# Altium PCB Placa_TP1.PcbDoc
Units mm, origin at the board's own origin, x right, y up, seen from the top; angles counter-clockwise.
Board outline 134.62 x 176.53 mm, 2 copper layers (Top Layer, Bottom Layer); 168 components, 105 nets, 468 pads, 64 vias.
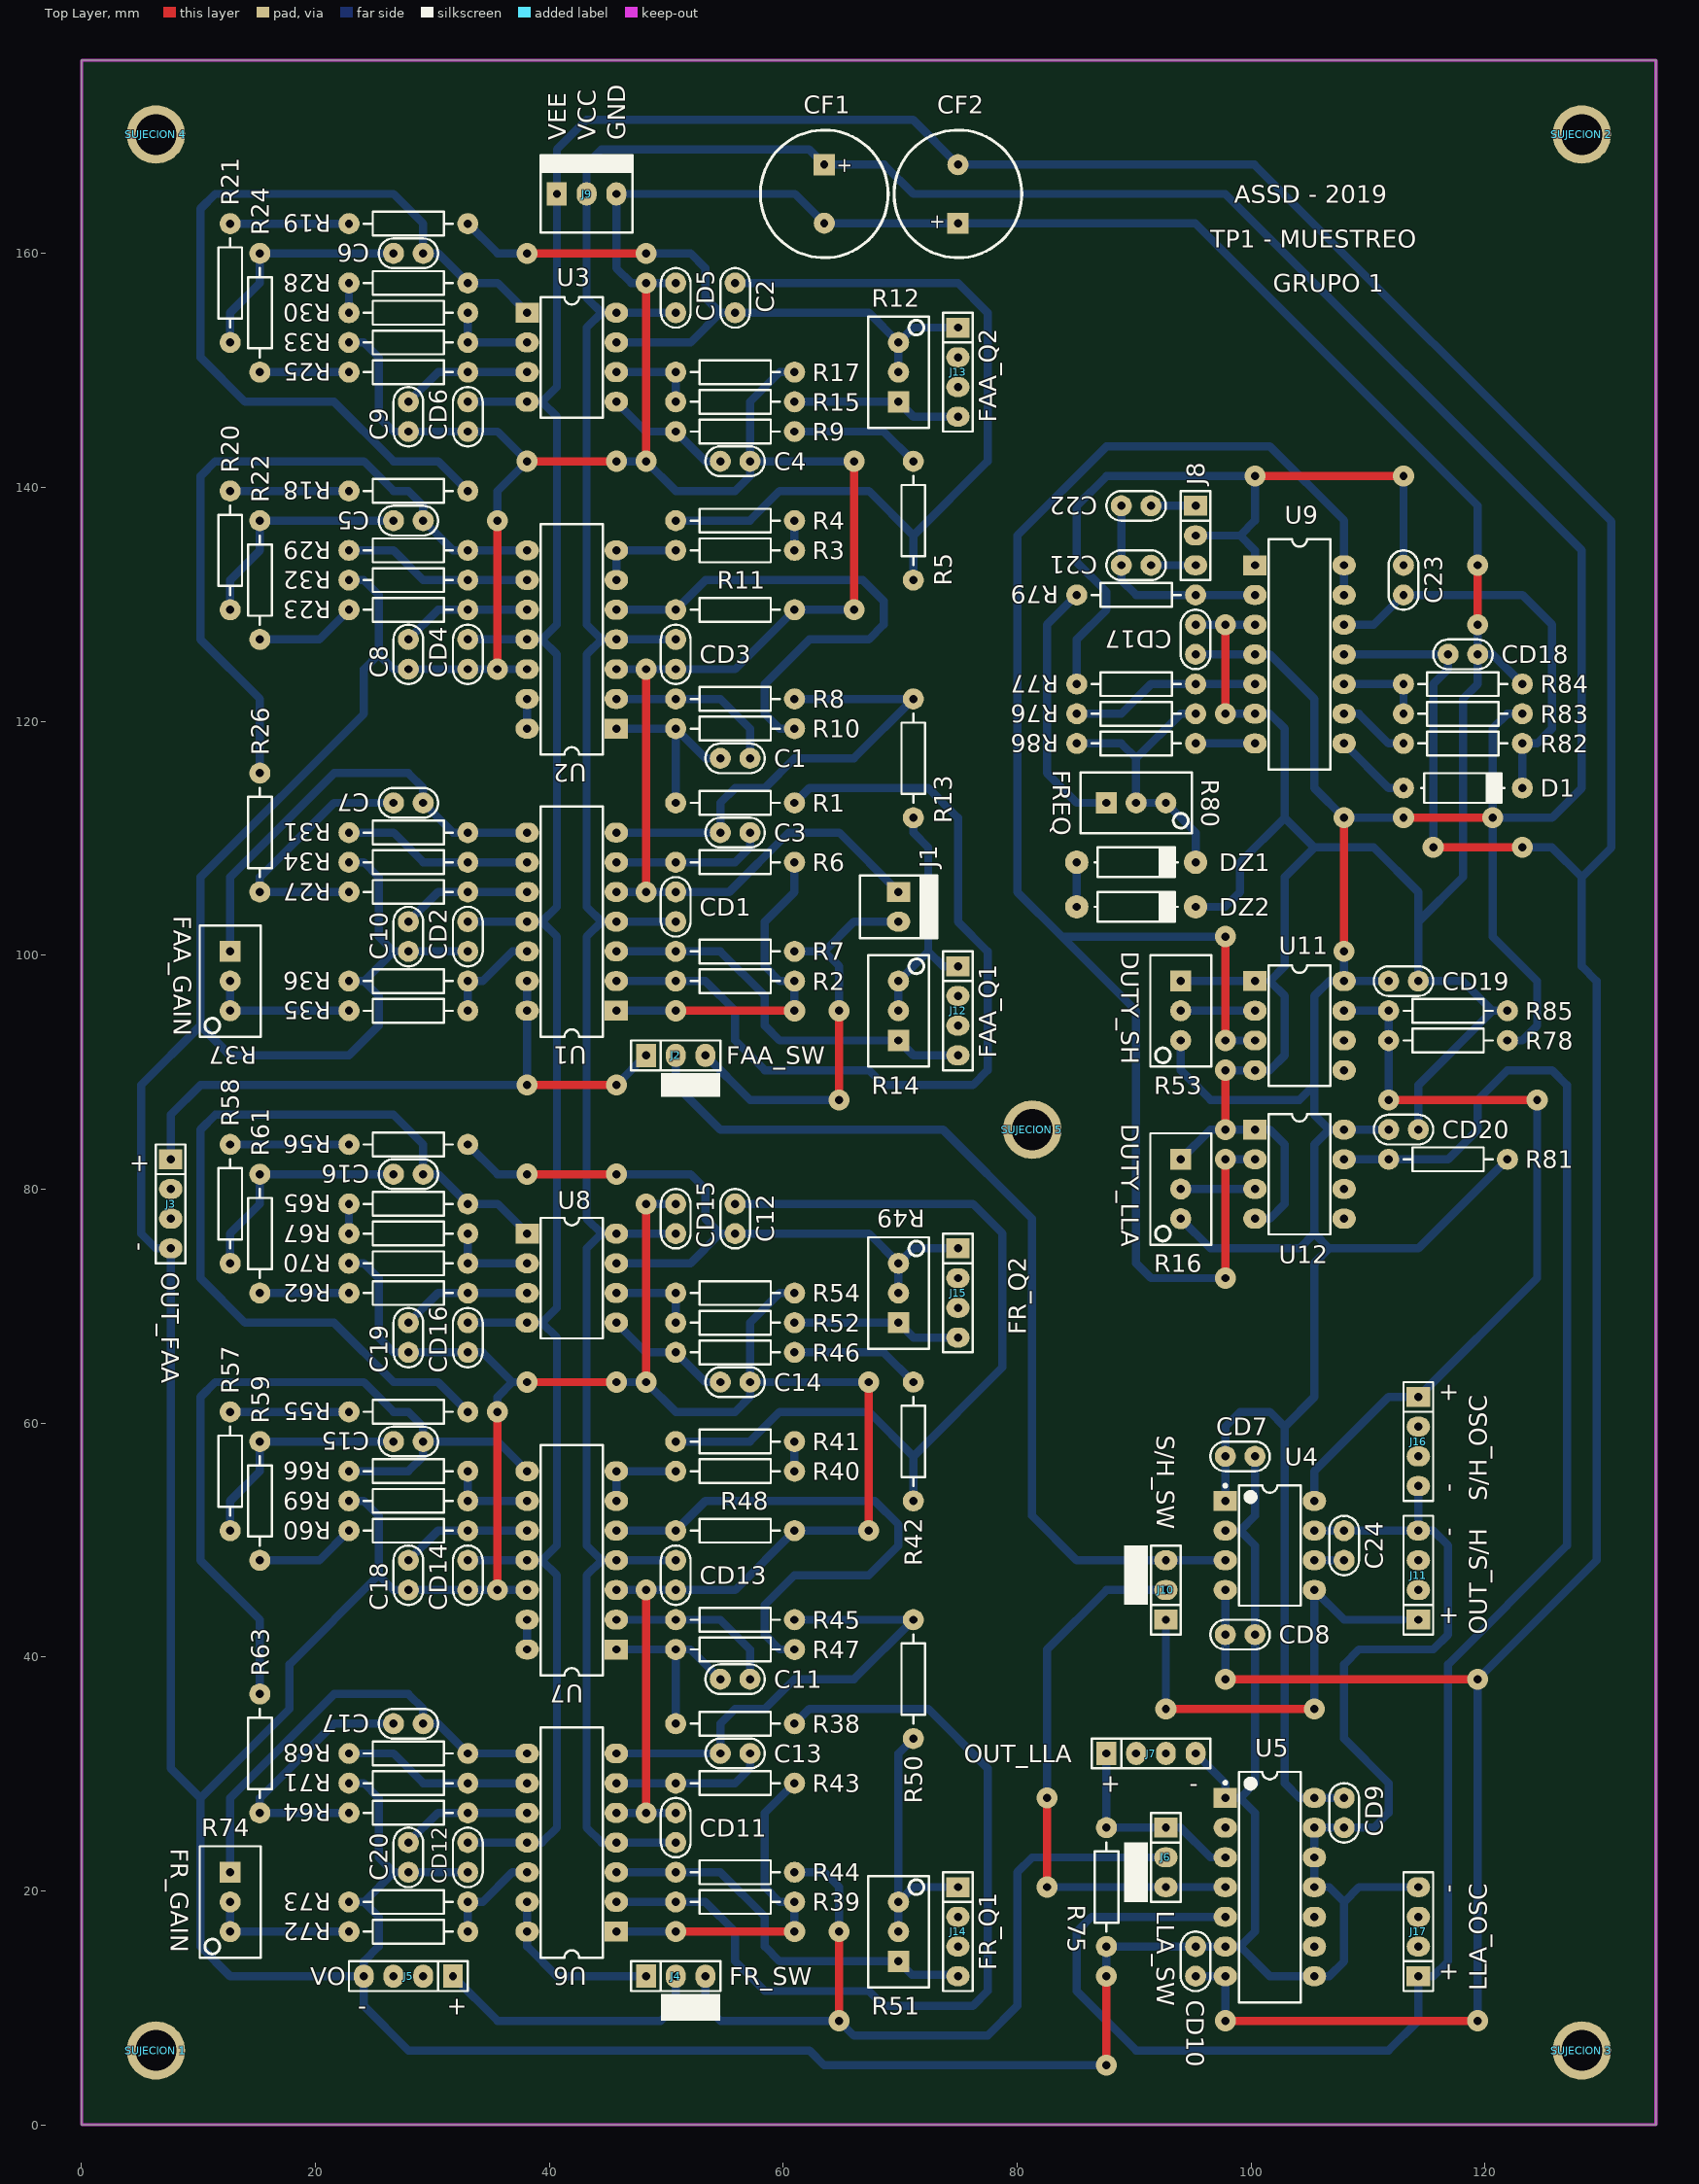
[diagram p0: Top Layer view]
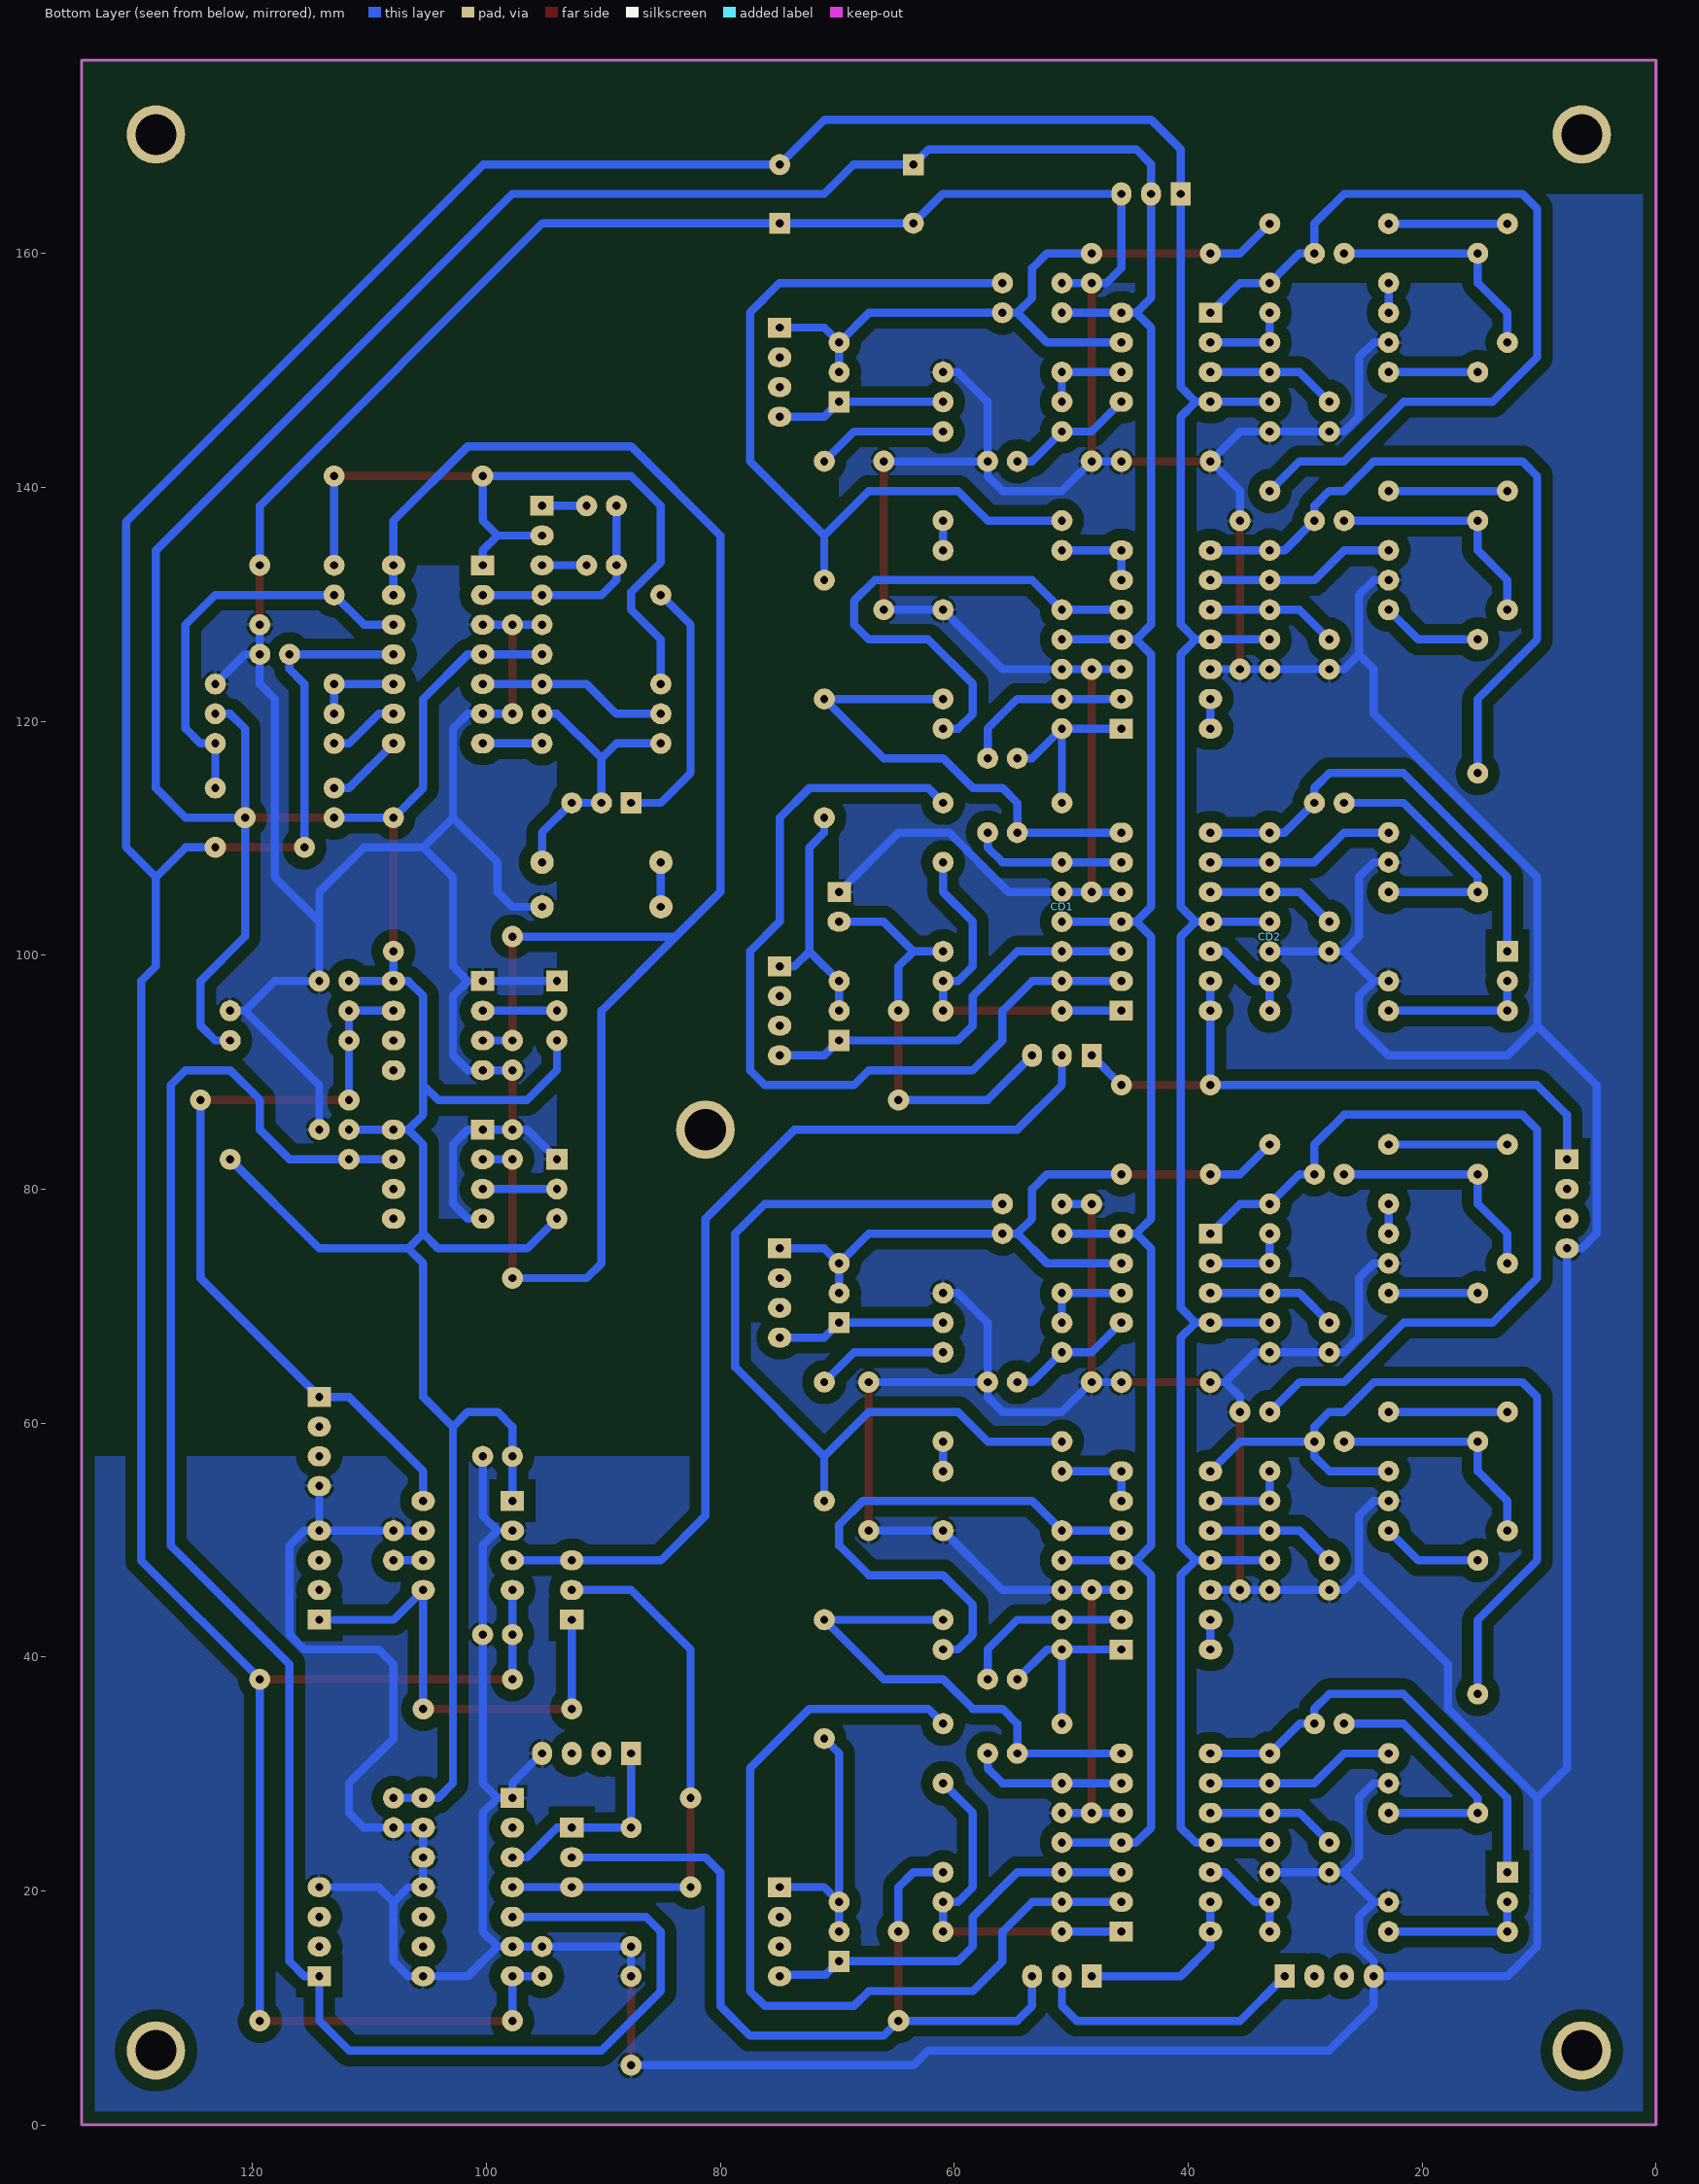
[diagram p1: Bottom Layer view, seen from below]
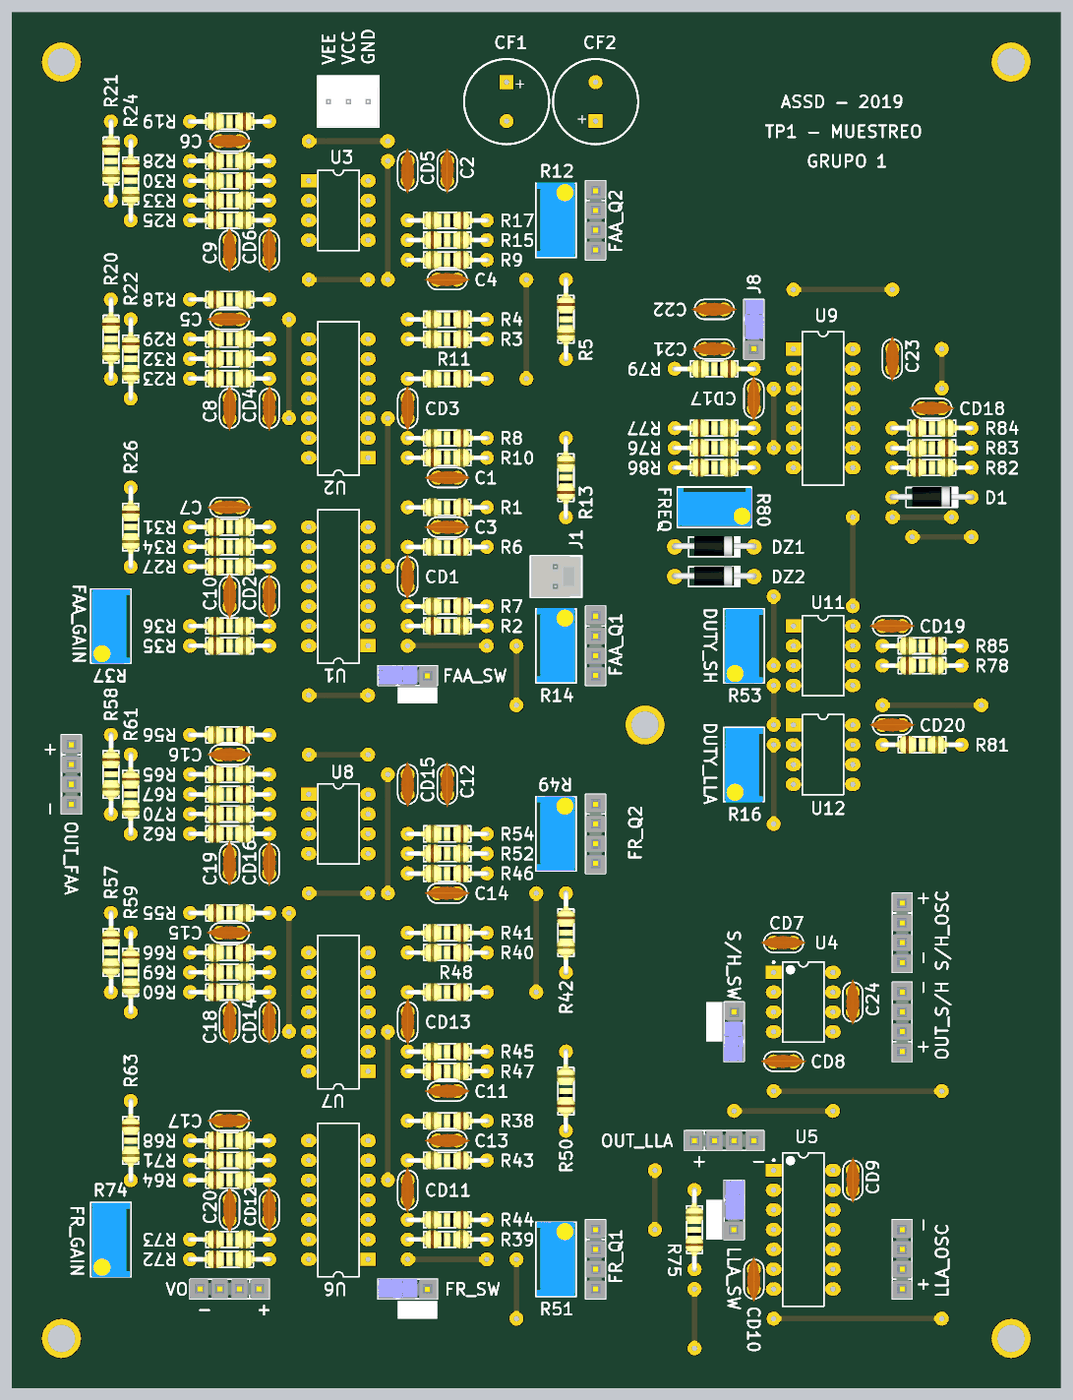
[diagram p2: 3D render of the assembled board from above, using the file's embedded part models]

## Layer stack, top to bottom
Top Solder: solder mask 0.0102, Solder Resist, Dk 3.5
Top Layer: signal copper 0.0356
Dielectric 1: dielectric 0.32, FR-4, Dk 4.8
Bottom Layer: signal copper 0.0356
Bottom Solder: solder mask 0.0102, Solder Resist, Dk 3.5

## Board outline
0,0 0,176.53 134.62,176.53 134.62,0

## Design rules (kind name [scope] priority, off if disabled: settings)
Clearance [All] p1: gap=0.7
ComponentClearance [All] p1: gap=0.2 collisioncheckmode=3 verticalgap=0.254 showdistances=FALSE
PolygonConnect [All] p1: connectstyle=Relief reliefconductorwidth=0.254 reliefentries=4 polygonreliefangle="90 Angle" airgapwidth=0.254
RoutingVias [All] p1: holewidth=0.7 width=1.8 viastyle="Through Hole" minholewidth=0.7 minwidth=1.8 maxholewidth=0.7 maxwidth=1.8
SolderMaskExpansion [All] p1: expansion=0.102
Width [All] p1: maxlimit=0.7 minlimit=0.7 preferedwidth=0.7
29 further rules are at their usual default settings.

## Classes and differential pairs
component class SampleANDHold: C24 CD7 CD8 CF1 CF2 J9 J10 J11 ROT2 "SUJECION 1" "SUJECION 2" "SUJECION 3" "SUJECION 4" "SUJECION 5" U4
component class Oscilador: C21 C22 C23 CD17 CD18 CD19 CD20 D1 DZ1 DZ2 J8 J16 J17 R16 R53 R76 R77 R78 R79 R80 R81 R82 R83 R84 R85 R86 ROT5 U9 U11 U12
component class LLaveAnalogica: CD9 CD10 J6 J7 R75 ROT3 U5
component class FiltroRecuperador: C11 C12 C13 C14 C15 C16 C17 C18 C19 C20 CD11 CD12 CD13 CD14 CD15 CD16 J4 J5 J14 J15 R38 R39 R40 R41 R42 R43 R44 R45 R46 R47 R48 R49 R50 R51 R52 R54 R55 R56 R57 R58 R59 R60 R61 R62 R63 R64 R65 R66 R67 R68 R69 R70 R71 R72 R73 R74 ROT4 U6 U7 U8
component class FiltroAntialiasing: C1 C2 C3 C4 C5 C6 C7 C8 C9 C10 CD1 CD2 CD3 CD4 CD5 CD6 J1 J2 J3 J12 J13 R1 R2 R3 R4 R5 R6 R7 R8 R9 R10 R11 R12 R13 R14 R15 R17 R18 R19 R20 R21 R22 R23 R24 R25 R26 R27 R28 R29 R30 R31 R32 R33 R34 R35 R36 R37 ROT1 U1 U2 U3

## Components (designator, comment, footprint, x,y, rotation, side; value= is the part's Value field where it differs from the comment)
C1 "100n" CAP100#1 55.88,116.84 r180 top
C2 "100n" CAP100#1 55.88,156.21 r270 top
C3 "100n" CAP100#1 55.88,110.49 r180 top
C4 "100n" CAP100#1 55.88,142.24 r0 top
C5 "100n" CAP100#1 27.94,137.16 r0 top
C6 "100n" CAP100#1 27.94,160.02 r0 top
C7 "100n" CAP100#1 27.94,113.03 r0 top
C8 "100n" CAP100#1 27.94,125.73 r270 top
C9 "100n" CAP100#1 27.94,146.05 r90 top
C10 "100n" CAP100#1 27.94,101.6 r270 top
C11 "100n" CAP100#1 55.88,38.1 r180 top
C12 "100n" CAP100#1 55.88,77.47 r270 top
C13 "100n" CAP100#1 55.88,31.75 r180 top
C14 "100n" CAP100#1 55.88,63.5 r0 top
C15 "100n" CAP100#1 27.94,58.42 r0 top
C16 "100n" CAP100#1 27.94,81.28 r0 top
C17 "100n" CAP100#1 27.94,34.29 r0 top
C18 "100n" CAP100#1 27.94,46.99 r270 top
C19 "100n" CAP100#1 27.94,67.31 r90 top
C20 "100n" CAP100#1 27.94,22.86 r270 top
C21 "10n" CAP100#1 90.17,133.35 r0 top
C22 "1n" CAP100#1 90.17,138.43 r0 top
C23 "100n" CAP100#1 113.03,132.08 r270 top
C24 "10n" CAP100#1 107.95,49.53 r90 top
CD1 "100n" CAP100#2 50.8,104.14 r270 bottom
CD2 "100n" CAP100#2 33.02,101.6 r90 bottom
CD3 "100n" CAP100#1 50.8,125.73 r270 top
CD4 "100n" CAP100#1 33.02,125.73 r270 top
CD5 "100n" CAP100#1 50.8,156.21 r90 top
CD6 "100n" CAP100#1 33.02,146.05 r270 top
CD7 "100n" CAP100#1 99.06,57.15 r0 top
CD8 "100n" CAP100#1 99.06,41.91 r0 top
CD9 "100n" CAP100#1 107.95,26.67 r270 top
CD10 "100n" CAP100#1 95.25,13.97 r90 top
CD11 "100n" CAP100#1 50.8,25.4 r90 top
CD12 "100n" CAP100#1 33.02,22.86 r270 top
CD13 "100n" CAP100#1 50.8,46.99 r270 top
CD14 "100n" CAP100#1 33.02,46.99 r270 top
CD15 "100n" CAP100#1 50.8,77.47 r90 top
CD16 "100n" CAP100#1 33.02,67.31 r270 top
CD17 "100n" CAP100#1 95.25,127 r90 top
CD18 "100n" CAP100#1 118.11,125.73 r0 top
CD19 "100n" CAP100#1 113.03,97.79 r0 top
CD20 "100n" CAP100#1 113.03,85.09 r0 top
CF1 "330u" CAP200RP 63.5,165.1 r270 top
CF2 "330u" CAP200RP 74.93,165.1 r90 top
D1 "1N4148" DO41#1 118.11,114.3 r0 top
DZ1 "1N4733" DO41#2 90.17,107.95 r0 top
DZ2 "1N4733" DO41#2 90.17,104.14 r0 top
J1 "V_INPUT" MOLEX2 69.85,105.41 r270 top
J2 "FAA_SW" JUMPER3 50.8,91.44 r0 top
J3 "OUT_FAA" SIP4 7.62,78.74 r270 top
J4 "FR_SW" JUMPER3 50.8,12.7 r0 top
J5 "OUT_FR" SIP4 27.94,12.7 r180 top
J6 "LLA_SW" JUMPER3 92.71,22.86 r270 top
J7 "OUT_LLA" SIP4 91.44,31.75 r0 top
J8 "JUMPER" JUMPER3 95.25,135.89 r270 top
J9 "FUENTE" MOLEX3 40.64,165.1 r0 top
J10 "S/H_SW" JUMPER3 92.71,45.72 r90 top
J11 "OUT_S/H" SIP4 114.3,46.99 r90 top
J12 "TP_R14" SIP4 74.93,95.25 r270 top
J13 "TP_R12" SIP4 74.93,149.86 r270 top
J14 "TP_R51" SIP4 74.93,16.51 r270 top
J15 "TP_R49" SIP4 74.93,71.12 r270 top
J16 "S/H_OSC" SIP4 114.3,58.42 r270 top
J17 "LLA_OSC" SIP4 114.3,16.51 r90 top
R1 "10K" RES400 60.96,113.03 r180 top
R2 "10K" RES400 50.8,97.79 r0 top
R3 "1K" RES400 60.96,134.62 r180 top
R4 "82" RES400 60.96,137.16 r180 top
R5 "1K" RES400 71.12,142.24 r270 top
R6 "1K" RES400 60.96,107.95 r180 top
R7 "3K3" RES400 60.96,100.33 r180 top
R8 "1K" RES400 60.96,121.92 r180 top
R9 "82" RES400 60.96,144.78 r180 top
R10 "10K" RES400 50.8,119.38 r0 top
R11 "1K" RES400 60.96,129.54 r180 top
R12 "200" "PRESET V" 69.85,149.86 r90 top
R13 "47K" RES400 71.12,111.76 r90 top
R14 "20K" "PRESET V" 69.85,95.25 r90 top
R15 "1K8" RES400 50.8,147.32 r0 top
R16 "10K" "PRESET V" 93.98,80.01 r270 top
R17 "1K2" RES400 60.96,149.86 r180 top
R18 "1K5" RES400 22.86,139.7 r0 top
R19 "1K2" RES400 33.02,162.56 r180 top
R20 "270" RES400 12.7,139.7 r270 top
R21 "100" RES400 12.7,162.56 r270 top
R22 "1K5" RES400 15.24,137.16 r270 top
R23 "270" RES400 22.86,129.54 r0 top
R24 "1K2" RES400 15.24,160.02 r270 top
R25 "100" RES400 22.86,149.86 r0 top
R26 "2K4" RES400 15.24,115.57 r270 top
R27 "2K4" RES400 22.86,105.41 r0 top
R28 "560" RES400 22.86,157.48 r0 top
R29 "1K2" RES400 22.86,134.62 r0 top
R30 "1K" RES400 33.02,154.94 r180 top
R31 "2K2" RES400 22.86,110.49 r0 top
R32 "1K5" RES400 22.86,132.08 r0 top
R33 "1K2" RES400 22.86,152.4 r0 top
R34 "15K" RES400 22.86,107.95 r0 top
R35 "10K" RES400 22.86,95.25 r0 top
R36 "10K" RES400 22.86,97.79 r0 top
R37 "10K" "PRESET V" 12.7,97.79 r270 top
R38 "10K" RES400 60.96,34.29 r180 top
R39 "10K" RES400 50.8,19.05 r0 top
R40 "1K" RES400 60.96,55.88 r180 top
R41 "82" RES400 60.96,58.42 r180 top
R42 "1K" RES400 71.12,63.5 r270 top
R43 "1K" RES400 60.96,29.21 r180 top
R44 "3K3" RES400 60.96,21.59 r180 top
R45 "1K" RES400 60.96,43.18 r180 top
R46 "82" RES400 60.96,66.04 r180 top
R47 "10K" RES400 50.8,40.64 r0 top
R48 "1K" RES400 60.96,50.8 r180 top
R49 "200" "PRESET V" 69.85,71.12 r90 top
R50 "47K" RES400 71.12,33.02 r90 top
R51 "20K" "PRESET V" 69.85,16.51 r90 top
R52 "1K8" RES400 50.8,68.58 r0 top
R53 "10K" "PRESET V" 93.98,95.25 r270 top
R54 "1K2" RES400 60.96,71.12 r180 top
R55 "1K5" RES400 22.86,60.96 r0 top
R56 "1K2" RES400 33.02,83.82 r180 top
R57 "270" RES400 12.7,60.96 r270 top
R58 "100" RES400 12.7,83.82 r270 top
R59 "1K5" RES400 15.24,58.42 r270 top
R60 "270" RES400 22.86,50.8 r0 top
R61 "1K2" RES400 15.24,81.28 r270 top
R62 "100" RES400 22.86,71.12 r0 top
R63 "2K4" RES400 15.24,36.83 r270 top
R64 "2K4" RES400 22.86,26.67 r0 top
R65 "560" RES400 22.86,78.74 r0 top
R66 "1K2" RES400 33.02,55.88 r180 top
R67 "1K" RES400 33.02,76.2 r180 top
R68 "2K2" RES400 22.86,31.75 r0 top
R69 "1K5" RES400 22.86,53.34 r0 top
R70 "1K2" RES400 22.86,73.66 r0 top
R71 "15K" RES400 22.86,29.21 r0 top
R72 "10K" RES400 22.86,16.51 r0 top
R73 "10K" RES400 22.86,19.05 r0 top
R74 "10K" "PRESET V" 12.7,19.05 r270 top
R75 "10K" RES400 87.63,15.24 r90 top
R76 "RES" RES400 85.09,120.65 r0 top
R77 "1K" RES400 85.09,123.19 r0 top
R78 "1K" RES400 111.76,92.71 r0 top
R79 "RES" RES400 95.25,130.81 r180 top
R80 "PRESET" "PRESET V" 90.17,113.03 r0 top
R81 "1K" RES400 111.76,82.55 r0 top
R82 "1K" RES400 113.03,118.11 r0 top
R83 "6K8" RES400 123.19,120.65 r180 top
R84 "1K" RES400 113.03,123.19 r0 top
R85 "680" RES400 121.92,95.25 r180 top
R86 "RES" RES400 85.09,118.11 r0 top
"SUJECION 1" "SUJECION" "SUJECION (5.00MM - 3.50MM)" 6.35,6.35 r90 top
"SUJECION 2" "SUJECION" "SUJECION (5.00MM - 3.50MM)" 128.27,170.18 r90 top
"SUJECION 3" "SUJECION" "SUJECION (5.00MM - 3.50MM)" 128.27,6.35 r90 top
"SUJECION 4" "SUJECION" "SUJECION (5.00MM - 3.50MM)" 6.35,170.18 r90 top
"SUJECION 5" "SUJECION" "SUJECION (5.00MM - 3.50MM)" 81.28,85.09 r90 top
U1 "TL084N" N014 41.91,102.87 r90 top
U2 "TL084N" N014 41.91,127 r90 top
U3 "TL082JG" JG008 41.91,151.13 r270 top
U4 "LF398N" N08E 101.6,49.53 r0 top
U5 "CD4066BCN" N14A 101.6,20.32 r0 top
U6 "TL084N" N014 41.91,24.13 r90 top
U7 "TL084N" N014 41.91,48.26 r90 top
U8 "TL082JG" JG008 41.91,72.39 r270 top
U9 "TL084N" N014 104.14,125.73 r270 top
U11 "LM311N" 626-05 104.14,93.98 r270 top
U12 "LM311N" 626-05 104.14,81.28 r270 top

## Footprints (in the part's own frame and the unit in brackets; to place one, negate y for a bottom-side part, rotate by r counter-clockwise, add the part's x,y. Pads: shape width x height; smd on the part's side, far side on the other; paste and mask are expansions set on the pad)
626-05 [mm] "DIP; 8 Leads; Row Spacing 7.62 mm; Pitch 2.54 mm"
  rect 1.7x2 hole 0.7: 1(-3.81,-3.81)
  oval 1.7x2 hole 0.7: 2(-1.27,-3.81) 3(1.27,-3.81) 4(3.81,-3.81) 5(3.81,3.81) 6(1.27,3.81) 7(-1.27,3.81) 8(-3.81,3.81)
  silkscreen extent -5.15,-2.65 5.15,2.65
CAP100#1 [mm]
  round 1.8 hole 0.7: 1(-1.27,0) 2(1.27,0)
  silkscreen extent -2.54,-1.27 2.54,1.27, body extent -2.92,-0.84 2.92,0.86, height 6.12
CAP100#2 [mm]
  round 1.8 hole 0.7: 1(1.27,0) 2(-1.27,0)
  body extent -2.92,-0.84 2.92,0.86, height 6.12
CAP200RP [mm] "Body Diameter 10.33mm"
  rect 1.8x1.8 hole 0.7: 1(-2.5,0)
  round 1.8 hole 0.7: 2(2.5,0)
  silkscreen extent -5.46,-5.46 5.46,5.46, body extent -5.2,-5.18 5.18,5.21, height 20
DO41#1 [mm]
  round 1.8 hole 0.7: 1(-5.08,0) 2(5.08,0)
  silkscreen extent -3.56,-1.27 3.56,1.27, body extent -5.46,-1.19 5.46,1.37, height 2.03
DO41#2 [mm]
  round 2 hole 0.7: 1(-5.08,0) 2(5.08,0)
  silkscreen extent -3.56,-1.27 3.56,1.27, body extent -5.46,-1.19 5.46,1.37, height 2.03
JG008 [mm] "DIP; 8 Leads; Row Spacing 7.62 mm; Pitch 2.54 mm"
  rect 1.7x2 hole 0.7: 1(-3.81,-3.81)
  oval 1.7x2 hole 0.7: 2(-1.27,-3.81) 3(1.27,-3.81) 4(3.81,-3.81) 5(3.81,3.81) 6(1.27,3.81) 7(-1.27,3.81) 8(-3.81,3.81)
  silkscreen extent -5.15,-2.65 5.15,2.65
JUMPER3 [mm]
  rect 1.7x2 hole 0.7: 1(-2.54,0)
  oval 1.7x2 hole 0.7: 2(0,0) 3(2.54,0)
  silkscreen extent -3.81,-1.27 3.81,1.27, body extent -3.81,-1.3 3.81,1.27, height 16.15
MOLEX2 [mm]
  rect 1.7x2 hole 0.7: 1(0,0)
  oval 1.7x2 hole 0.7: 2(2.54,0)
  silkscreen extent -1.4,-3.3 3.94,3.3, body extent -1.27,-3.18 3.81,3.18, height 10.74
MOLEX3 [mm]
  rect 1.7x2 hole 0.7: 1(0,0)
  oval 1.7x2 hole 0.7: 2(2.54,0) 3(5.08,0)
  silkscreen extent -1.4,-3.3 6.48,3.3, body extent -1.27,-3.17 6.35,3.17, height 10.74
N08E [mm] "DIP, 8-Leads, Row Spacing 7.62mm, Pitch 2.54mm, Body 9.91x6.35mm"
  rect 2x1.7 hole 0.7: 1(-3.81,3.81)
  oval 2x1.7 hole 0.7: 2(-3.81,1.27) 3(-3.81,-1.27) 4(-3.81,-3.81) 5(3.81,-3.81) 6(3.81,-1.27) 7(3.81,1.27) 8(3.81,3.81)
  silkscreen extent -3.93,-5.15 2.65,5.23, body extent -3.6,-5.15 3.6,5.15, height 5.34
N014 [mm] "DIP; 14 Leads; Row Spacing 7.62 mm; Pitch 2.54 mm"
  rect 1.7x2 hole 0.7: 1(-7.62,-3.81)
  oval 1.7x2 hole 0.7: 2(-5.08,-3.81) 3(-2.54,-3.81) 4(0,-3.81) 5(2.54,-3.81) 6(5.08,-3.81) 7(7.62,-3.81) 8(7.62,3.81) 9(5.08,3.81) 10(2.54,3.81) 11(0,3.81) 12(-2.54,3.81) 13(-5.08,3.81) 14(-7.62,3.81)
  silkscreen extent -9.85,-2.65 9.85,2.65
N14A [mm] "DIP, 14-Leads, Row Spacing 7.62mm, Pitch 2.54mm, Body 19.18x6.35mm"
  rect 2x1.7 hole 0.7: 1(-3.81,7.62)
  oval 2x1.7 hole 0.7: 2(-3.81,5.08) 3(-3.81,2.54) 4(-3.81,0) 5(-3.81,-2.54) 6(-3.81,-5.08) 7(-3.81,-7.62) 8(3.81,-7.62) 9(3.81,-5.08) 10(3.81,-2.54) 11(3.81,0) 12(3.81,2.54) 13(3.81,5.08) 14(3.81,7.62)
  silkscreen extent -3.93,-9.85 2.65,9.85, body extent -3.55,-9.85 3.55,9.85, height 5.08
"PRESET V" [mm]
  rect 1.8x1.8 hole 0.7: 1(-2.54,0)
  round 1.8 hole 0.7: 2(0,0) 3(2.54,0)
  silkscreen extent -4.76,-2.6 4.76,2.6, body extent -4.7,-2.42 4.83,2.42, height 11.55
RES400 [mm]
  round 1.8 hole 0.7: 1(0,0) 2(10.16,0)
  silkscreen extent 1.27,-1.02 8.89,1.02, body extent -0.3,-1.14 10.46,1.17, height 2.43
SIP4 [mm]
  rect 1.7x2 hole 0.7: 1(-3.81,0)
  oval 1.7x2 hole 0.7: 2(-1.27,0) 3(1.27,0) 4(3.81,0)
  silkscreen extent -5.08,-1.27 5.08,1.27, body extent -5.08,-1.27 5.08,1.27, height 8.38
"SUJECION (5.00MM - 3.50MM)" [mm]
  round 5 hole 3.5: 1(0,0)

## Part data
C1 C2 C3 C4 C5 C6 C7 C8 C9 C10 C11 C12 C13 C14 C15 C16 C17 C18 C19 C20 C21 C22 C23 C24 CD1 CD2 CD3 CD4 CD5 CD6 CD7 CD8 CD9 CD10 CD11 CD12 CD13 CD14 CD15 CD16 CD17 CD18 CD19 CD20: library part CAP
CF1 CF2: library part CAPPOL
D1: library part "DIODO SCHOTTKY"
DZ1 DZ2: library part "DIODO ZENER"
J1: library part MOLEX2
J2 J4 J6 J8 J10: library part JUMPER3
J3 J5 J7 J11 J12 J13 J14 J15 J16 J17: library part CON4
J9: library part MOLEX3
R1 R2 R3 R4 R5 R6 R7 R8 R9 R10 R11 R13 R15 R17 R18 R19 R20 R21 R22 R23 R24 R25 R26 R27 R28 R29 R30 R31 R32 R33 R34 R35 R36 R38 R39 R40 R41 R42 R43 R44 R45 R46 R47 R48 R50 R52 R54 R55 R56 R57 R58 R59 R60 R61 R62 R63 R64 R65 R66 R67 R68 R69 R70 R71 R72 R73 R75 R77 R78 R81 R82 R83 R84 R85: library part RES
R12 R14 R16 R37 R49 R51 R53 R74: library part PRESET
U1 U2 U3 U6 U7 U8 U9: "JFET-Input Operational Amplifier"
U4: "Monolithic Sample-and-Hold Circuits"
U5: "Quad Bilateral Switch"
U11 U12: "High-Performance Voltage Comparator"

## Via types
v1: diameter 1.8, hole 0.7, Top Layer to Bottom Layer, 64 vias

## Nets (pads, with @x,y where several pads share a name; then routed paths per layer and width w, separated by ;. In a path a pad name is that pad's centre, name@x,y a point inside that pad or via, vN(x,y) a via of type N, cw(c..) or ccw(c..) an arc to the next point about the centre after c; other vN are vias at no path point)
FAA_NET: C2.2 J13.1 R12.2 R12.3 R19.1 U3.7 | length 60.6
  Top Layer w0.7: v1(38.1,160.02) v1(48.26,160.02)
  Bottom Layer w0.7: R19.1 35.56,160.02 v1(38.1,160.02) ; U3.7 52.07,152.4 54.61,154.94 ; v1(48.26,160.02) 52.07,160.02 53.34,158.75 53.34,156.21 54.61,154.94 ; R12.2 R12.3 ; J13.1 71.12,153.67 R12.3 ; 54.61,154.94 C2.2 67.31,154.94 R12.3
FAA_NET2: C7.2 R31.2 R37.1 U1.8 | length 38.3
  Bottom Layer w0.7: R37.1 12.7,106.68 21.59,115.57 27.94,115.57 29.21,114.3 C7.2 31.75,110.49 R31.2 U1.8
FR_NET: C12.2 J15.1 R49.2 R49.3 R56.1 U8.7 | length 60.6
  Top Layer w0.7: v1(38.1,81.28) v1(45.72,81.28)
  Bottom Layer w0.7: R56.1 35.56,81.28 v1(38.1,81.28) ; U8.7 52.07,73.66 54.61,76.2 ; v1(45.72,81.28) 52.07,81.28 53.34,80.01 53.34,77.47 54.61,76.2 ; R49.2 R49.3 ; J15.1 71.12,74.93 R49.3 ; 54.61,76.2 C12.2 67.31,76.2 R49.3
FR_NET2: C17.2 R68.2 R74.1 U6.8 | length 38.3
  Bottom Layer w0.7: R74.1 12.7,27.94 21.59,36.83 27.94,36.83 29.21,35.56 C17.2 30.48,34.29 R68.2 U6.8
GND: C4.2 C8.2 C9.1 C10.2 C14.2 C18.2 C19.1 C20.2 C24.2 CD1.2 CD2.2 CD3.2 CD4.2 CD5.2 CD6.2 CD7.2 CD8.2 CD9.2 CD10.2 CD11.2 CD12.2 CD13.2 CD14.2 CD15.2 CD16.2 CD17.2 CD18.2 CD19.2 CD20.2 CF1.2 CF2.1 DZ2.2 J1.1 J3.4 J5.4 J7.4 J9.3 J11.4 J16.4 J17.4 R11.1 R16.1 R17.1 R32.1 R33.1 R34.1 R36.1 R48.1 R53.1 R54.1 R69.1 R70.1 R71.1 R73.1 R75.1 R84.2 R85.1 U1.5 U2.3 U2.12 U4.2 U4.7 U5.1 U5.6 U5.8 U5.11 U5.12 U5.13 U6.5 U7.3 U7.12 U9.3 U9.6 U11.1 U11.4 U12.1 U12.4 | length 1118.6
  Top Layer w0.7: v1(35.56,45.72) v1(35.56,60.96) ; v1(35.56,124.46) v1(35.56,137.16) ; v1(38.1,63.5) v1(45.72,63.5) ; v1(38.1,142.24) v1(45.72,142.24) ; v1(48.26,26.67) v1(48.26,45.72) ; v1(48.26,63.5) v1(48.26,78.74) ; v1(48.26,105.41) v1(48.26,124.46) ; v1(48.26,142.24) v1(48.26,157.48) ; v1(66.04,129.54) v1(66.04,142.24) ; v1(67.31,50.8) v1(67.31,63.5) ; v1(87.63,5.08) v1(87.63,12.7) ; v1(97.79,85.09) v1(97.79,90.17) ; v1(97.79,120.65) v1(97.79,128.27) ; v1(119.38,128.27) v1(119.38,133.35)
  Bottom Layer w0.7: R73.1 24.13,19.05 ; R71.1 24.13,29.21 25.4,27.94 25.4,22.86 26.67,21.59 ; R69.1 24.13,53.34 25.4,52.07 25.4,46.99 ; R70.1 24.13,73.66 25.4,72.39 25.4,67.31 26.67,66.04 C19.1 CD16.2 34.29,66.04 36.83,63.5 ; R36.1 24.13,97.79 ; R34.1 24.13,107.95 25.4,106.68 25.4,101.6 26.67,100.33 ; R32.1 24.13,132.08 25.4,130.81 25.4,125.73 ; R33.1 24.13,152.4 25.4,151.13 25.4,146.05 26.67,144.78 C9.1 CD6.2 35.56,144.78 v1(38.1,142.24) 35.56,139.7 v1(35.56,137.16) ; CD12.2 C20.2 26.67,21.59 ; CD2.2 C10.2 26.67,100.33 ; v1(35.56,60.96) 35.56,62.23 36.83,63.5 ; U7.12 v1(35.56,45.72) CD14.2 C18.2 26.67,45.72 25.4,46.99 ; v1(38.1,63.5) 36.83,63.5 ; U2.12 v1(35.56,124.46) CD4.2 C8.2 26.67,124.46 25.4,125.73 ; U6.5 v1(48.26,26.67) CD11.2 ; U7.3 v1(48.26,45.72) CD13.2 55.88,45.72 R48.1 v1(67.31,50.8) ; v1(45.72,63.5) v1(48.26,63.5) 50.8,60.96 55.88,60.96 57.15,62.23 C14.2 ; U1.5 v1(48.26,105.41) CD1.2 55.372,105.41 60.452,110.49 64.77,110.49 J1.1 ; U2.3 v1(48.26,124.46) CD3.2 55.88,124.46 R11.1 v1(66.04,129.54) ; v1(45.72,142.24) v1(48.26,142.24) 50.8,139.7 55.88,139.7 57.15,140.97 C4.2 ; v1(48.26,78.74) CD15.2 ; CD5.2 v1(48.26,157.48) 46.99,157.48 45.72,158.75 J9.3 61,165.1 CF1.2 CF2.1 95.21,162.6 119.38,138.43 v1(119.38,133.35) ; R54.1 59.69,71.12 57.15,68.58 C14.2 ; R17.1 59.69,149.86 57.15,147.32 C4.2 ; v1(66.04,142.24) C4.2 ; v1(67.31,63.5) C14.2 ; v1(87.63,5.08) 63.5,5.08 62.23,6.35 27.94,6.35 24.13,10.16 J5.4 ; v1(87.63,12.7) R75.1 CD10.2 U5.6 99.06,15.24 ; R16.1 96.52,85.09 v1(97.79,85.09) U12.1 101.6,85.09 102.87,83.82 102.87,78.74 101.6,77.47 U12.4 ; R53.1 U11.1 ; J7.4 97.79,29.21 U5.1 99.06,27.94 ; DZ2.2 97.79,104.14 99.06,105.41 99.06,107.95 102.87,111.76 ; CD17.2 v1(97.79,128.27) U9.3 ; v1(97.79,90.17) U11.4 101.6,90.17 102.87,91.44 102.87,96.52 101.6,97.79 102.87,99.06 102.87,106.68 105.41,109.22 ; v1(97.79,120.65) U9.6 101.6,120.65 102.87,119.38 102.87,111.76 ; CD7.2 100.33,52.07 99.06,50.8 100.33,49.53 CD8.2 100.33,29.21 99.06,27.94 ; U4.7 C24.2 J11.4 ; J17.4 109.22,20.32 107.95,19.05 ; J16.4 J11.4 ; CD20.2 114.3,88.9 120.65,95.25 ; v1(119.38,128.27) CD18.2 ; R85.1 120.65,95.25 ; R84.2 120.65,125.73 CD18.2 ; 10.16,27.94 10.16,15.24 12.7,12.7 J5.4 ; 10.16,27.94 17.78,35.56 17.78,39.37 25.4,46.99 ; 10.16,27.94 7.62,30.48 J3.4 6.35,74.93 5.08,76.2 5.08,88.9 10.16,93.98 ; 10.16,93.98 10.16,106.68 24.13,120.65 24.13,124.46 25.4,125.73 ; 10.16,93.98 12.7,91.44 22.86,91.44 25.4,93.98 25.4,96.52 24.13,97.79 ; J5.4 24.13,13.97 25.4,15.24 25.4,17.78 24.13,19.05 ; 24.13,19.05 26.67,21.59 ; 24.13,97.79 26.67,100.33 ; 99.06,15.24 100.33,16.51 100.33,26.67 99.06,27.94 ; 99.06,15.24 101.6,12.7 U5.8 106.68,12.7 107.95,13.97 107.95,19.05 ; 102.87,111.76 105.41,109.22 ; 105.41,109.22 110.49,109.22 114.3,105.41 114.3,102.87 ; 107.95,19.05 106.68,20.32 U5.11 U5.12 U5.13 CD9.2 110.49,25.4 111.76,26.67 111.76,29.21 107.95,33.02 107.95,39.37 109.22,40.64 115.57,40.64 116.84,41.91 116.84,49.53 115.57,50.8 J11.4 ; 114.3,102.87 118.11,106.68 118.11,121.92 119.38,123.19 CD18.2 ; 114.3,102.87 CD19.2 118.11,97.79 120.65,95.25
NetC1_1: C1.1 R8.2 U2.2 | length 15
  Bottom Layer w0.7: U2.2 R8.2 54.61,121.92 57.15,119.38 C1.1
NetC1_2: C1.2 R1.2 R10.1 U2.1 | length 16.3
  Bottom Layer w0.7: U2.1 R10.1 ; R1.2 R10.1 ; C1.2 53.34,116.84 R10.1
NetC2_1: C2.1 R4.2 R5.2 | length 71.1
  Bottom Layer w0.7: R4.2 57.15,137.16 59.69,139.7 67.31,139.7 71.12,135.89 ; C2.1 74.93,157.48 77.47,154.94 77.47,142.24 71.12,135.89 ; R5.2 71.12,135.89
NetC3_1: C3.1 R6.2 U1.6 | length 13.2
  Bottom Layer w0.7: U1.6 R6.2 55.88,107.95 57.15,109.22 C3.1
NetC3_2: C3.2 R8.1 R13.2 U1.7 | length 41.8
  Bottom Layer w0.7: U1.7 C3.2 54.61,113.03 55.88,114.3 58.42,114.3 60.96,116.84 66.04,116.84 R13.2 R8.1
NetC4_1: C4.1 R9.2 U3.5 | length 11
  Bottom Layer w0.7: U3.5 48.26,144.78 R9.2 53.34,142.24 C4.1
NetC5_1: C5.1 R20.2 R22.1 | length 20.1
  Bottom Layer w0.7: R20.2 12.7,132.08 15.24,134.62 R22.1 C5.1
NetC5_2: C5.2 R26.1 R29.2 U2.8 | length 59.9
  Bottom Layer w0.7: R26.1 15.24,121.92 10.16,127 10.16,140.97 11.43,142.24 24.13,142.24 26.67,139.7 27.94,139.7 29.21,138.43 C5.2 31.75,134.62 R29.2 U2.8
NetC6_1: C6.1 R21.2 R24.1 | length 20.1
  Bottom Layer w0.7: R21.2 12.7,154.94 15.24,157.48 R24.1 C6.1
NetC6_2: C6.2 R18.2 R28.2 U3.1 | length 74.5
  Bottom Layer w0.7: R18.2 30.48,142.24 26.67,142.24 21.59,147.32 13.97,147.32 10.16,151.13 10.16,163.83 11.43,165.1 26.67,165.1 29.21,162.56 C6.2 30.48,160.02 R28.2 35.56,157.48 U3.1
NetC7_1: C7.1 R26.2 R27.1 | length 23
  Bottom Layer w0.7: R27.1 R26.2 15.24,106.68 21.59,113.03 C7.1
NetC8_1: C8.1 R23.2 U2.10 | length 11.2
  Bottom Layer w0.7: C8.1 30.48,129.54 R23.2 U2.10
NetC9_2: C9.2 R25.2 U3.3 | length 11.2
  Bottom Layer w0.7: C9.2 30.48,149.86 R25.2 U3.3
NetC10_1: C10.1 R27.2 U1.10 | length 11.2
  Bottom Layer w0.7: C10.1 30.48,105.41 R27.2 U1.10
NetC11_1: C11.1 R45.2 U7.2 | length 15
  Bottom Layer w0.7: U7.2 R45.2 54.61,43.18 57.15,40.64 C11.1
NetC11_2: C11.2 R38.2 R47.1 U7.1 | length 16.3
  Bottom Layer w0.7: U7.1 R47.1 ; R38.2 R47.1 ; C11.2 52.07,40.64 R47.1
NetC12_1: C12.1 R41.2 R42.2 | length 72.9
  Bottom Layer w0.7: R41.2 57.15,58.42 59.69,60.96 67.31,60.96 71.12,57.15 ; C12.1 76.2,78.74 78.74,76.2 78.74,64.77 71.12,57.15 ; R42.2 71.12,57.15
NetC13_1: C13.1 R43.2 U6.6 | length 13.2
  Bottom Layer w0.7: U6.6 R43.2 55.88,29.21 57.15,30.48 C13.1
NetC13_2: C13.2 R45.1 R50.2 U6.7 | length 41.8
  Bottom Layer w0.7: U6.7 C13.2 54.61,34.29 55.88,35.56 58.42,35.56 60.96,38.1 66.04,38.1 R50.2 R45.1
NetC14_1: C14.1 R46.2 U8.5 | length 11
  Bottom Layer w0.7: U8.5 48.26,66.04 R46.2 53.34,63.5 C14.1
NetC15_1: C15.1 R57.2 R59.1 | length 20.1
  Bottom Layer w0.7: R57.2 12.7,53.34 15.24,55.88 R59.1 C15.1
NetC15_2: C15.2 R63.1 R66.2 U7.8 | length 68
  Bottom Layer w0.7: R63.1 15.24,43.18 10.16,48.26 10.16,62.23 11.43,63.5 24.13,63.5 26.67,60.96 27.94,60.96 29.21,59.69 C15.2 ; R66.2 27.94,55.88 29.21,57.15 C15.2 ; U7.8 35.56,58.42 C15.2
NetC16_1: C16.1 R58.2 R61.1 | length 20.1
  Bottom Layer w0.7: R58.2 12.7,76.2 15.24,78.74 R61.1 C16.1
NetC16_2: C16.2 R55.2 R65.2 U8.1 | length 74.5
  Bottom Layer w0.7: R55.2 30.48,63.5 26.67,63.5 21.59,68.58 13.97,68.58 10.16,72.39 10.16,85.09 11.43,86.36 26.67,86.36 29.21,83.82 C16.2 30.48,81.28 R65.2 35.56,78.74 U8.1
NetC17_1: C17.1 R63.2 R64.1 | length 23
  Bottom Layer w0.7: R64.1 R63.2 15.24,27.94 21.59,34.29 C17.1
NetC18_1: C18.1 R60.2 U7.10 | length 11.2
  Bottom Layer w0.7: C18.1 30.48,50.8 R60.2 U7.10
NetC19_2: C19.2 R62.2 U8.3 | length 11.2
  Bottom Layer w0.7: C19.2 30.48,71.12 R62.2 U8.3
NetC20_1: C20.1 R64.2 U6.10 | length 11.2
  Bottom Layer w0.7: C20.1 30.48,26.67 R64.2 U6.10
NetC21_1: C21.1 C22.1 R79.1 U9.2 | length 18.3
  Bottom Layer w0.7: C22.1 C21.1 88.9,132.08 90.17,130.81 U9.2
NetC21_2: C21.2 J8.3 | length 3.8
  Bottom Layer w0.7: C21.2 J8.3
NetC22_2: C22.2 J8.1 | length 3.8
  Bottom Layer w0.7: C22.2 J8.1
NetC23_2: C23.2 D1.2 R82.2 U9.12 | length 35.7
  Bottom Layer w0.7: U9.12 110.49,128.27 C23.2 123.19,130.81 125.73,128.27 125.73,119.38 124.46,118.11 R82.2 D1.2
NetC24_1: C24.1 U4.6 | length 2.5
  Bottom Layer w0.7: U4.6 C24.1
NetD1_1: D1.1 U9.8 | length 6.7
  Bottom Layer w0.7: U9.8 111.76,114.3 D1.1
NetDZ1_1: DZ1.1 DZ2.1 | length 3.8
  Bottom Layer w0.7: DZ2.1 DZ1.1
NetDZ1_2: DZ1.2 R76.2 R80.2 R80.3 R86.1 | length 24.7
  Bottom Layer w0.7: R86.1 88.9,118.11 90.17,116.84 ; DZ1.2 95.25,110.49 R80.3 R80.2 90.17,116.84 ; R76.2 93.98,120.65 90.17,116.84
NetJ2_1: J2.1 J3.1 U1.13 U1.14 | length 55.4
  Top Layer w0.7: v1(38.1,88.9) v1(45.72,88.9)
  Bottom Layer w0.7: J3.1 7.62,86.36 10.16,88.9 v1(38.1,88.9) U1.14 U1.13 ; v1(45.72,88.9) J2.1
NetJ2_2: J2.2 J10.3 U4.3 | length 81.2
  Bottom Layer w0.7: J2.2 50.8,88.9 54.61,85.09 73.66,85.09 81.28,77.47 81.28,52.07 85.09,48.26 J10.3 U4.3
NetJ4_1: J4.1 U6.13 U6.14 | length 15
  Bottom Layer w0.7: U6.13 U6.14 38.1,15.24 40.64,12.7 J4.1
NetJ4_2: J4.2 J5.1 | length 23.7
  Bottom Layer w0.7: J5.1 35.56,8.89 49.53,8.89 50.8,10.16 J4.2
NetJ4_3: J4.3 J6.2 R44.1 | length 71.7
  Top Layer w0.7: v1(64.77,8.89) v1(64.77,16.51)
  Bottom Layer w0.7: J4.3 53.34,10.16 54.61,8.89 v1(64.77,8.89) 66.04,7.62 77.47,7.62 80.01,10.16 80.01,21.59 81.28,22.86 J6.2 ; R44.1 63.5,21.59 64.77,20.32 v1(64.77,16.51)
NetJ6_1: J6.1 J7.1 R75.2 U5.3 | length 17.6
  Bottom Layer w0.7: J7.1 R75.2 J6.1 93.98,25.4 96.52,22.86 U5.3
NetJ6_3: J6.3 J10.2 U5.4 | length 47.8
  Top Layer w0.7: v1(82.55,20.32) v1(82.55,27.94)
  Bottom Layer w0.7: v1(82.55,20.32) J6.3 U5.4 ; v1(82.55,27.94) 82.55,40.64 87.63,45.72 J10.2
NetJ10_1: J10.1 J11.1 U4.5 | length 39.2
  Top Layer w0.7: v1(92.71,35.56) v1(105.41,35.56)
  Bottom Layer w0.7: v1(92.71,35.56) J10.1 ; v1(105.41,35.56) U4.5 107.95,43.18 113.03,43.18
NetJ12_1: J12.1 R13.1 R14.2 R14.3 | length 21.2
  Bottom Layer w0.7: R14.2 R14.3 72.39,100.33 ; R13.1 71.12,110.49 72.39,109.22 72.39,100.33 ; J12.1 73.66,99.06 72.39,100.33
NetJ12_4: J12.4 R7.2 R14.1 U1.3 | length 34.4
  Bottom Layer w0.7: U1.3 R7.2 54.61,100.33 58.42,96.52 58.42,93.98 59.69,92.71 R14.1 71.12,91.44 J12.4
NetJ13_4: J13.4 R12.1 R15.2 | length 14.5
  Bottom Layer w0.7: R15.2 R12.1 71.12,146.05 J13.4
NetJ14_1: J14.1 R50.1 R51.2 R51.3 | length 22.6
  Bottom Layer w0.7: R51.2 R51.3 ; R50.1 69.85,31.75 R51.3 ; J14.1 71.12,20.32 R51.3
NetJ14_4: J14.4 R44.2 R51.1 U6.3 | length 34.5
  Bottom Layer w0.7: U6.3 R44.2 54.61,21.59 58.42,17.78 58.42,15.24 59.69,13.97 R51.1 70.99,12.83 74.93,12.83 J14.4
NetJ15_4: J15.4 R49.1 R52.2 | length 14.5
  Bottom Layer w0.7: R52.2 R49.1 71.12,67.31 J15.4
NetJ16_1: J16.1 R78.1 R85.2 U4.8 U11.7 | length 67.8
  Top Layer w0.7: v1(111.76,87.63) v1(124.46,87.63)
  Bottom Layer w0.7: U4.8 105.41,55.88 111.76,62.23 J16.1 124.46,72.39 v1(124.46,87.63) ; U11.7 R85.2 R78.1 v1(111.76,87.63)
NetJ17_1: J17.1 R81.1 U5.5 U12.7 | length 160.9
  Bottom Layer w0.7: U5.5 86.36,17.78 85.09,16.51 85.09,11.43 90.17,6.35 111.76,6.35 114.3,8.89 J17.1 115.57,12.7 116.84,13.97 116.84,39.37 127,49.53 127,88.9 125.73,90.17 121.92,90.17 119.38,87.63 119.38,85.09 116.84,82.55 R81.1 U12.7
NetR1_1: R1.1 R2.1 U1.2 | length 75.6
  Bottom Layer w0.7: U1.2 R2.1 53.34,97.79 55.88,95.25 55.88,92.71 58.42,90.17 67.31,90.17 68.58,88.9 76.2,88.9 77.47,90.17 77.47,100.33 74.93,102.87 74.93,111.76 72.39,114.3 62.23,114.3 R1.1
NetR2_2: R2.2 R6.1 U1.1 | length 30.8
  Top Layer w0.7: v1(50.8,95.25) v1(60.96,95.25)
  Bottom Layer w0.7: U1.1 v1(50.8,95.25) ; v1(60.96,95.25) R2.2 59.69,97.79 58.42,99.06 58.42,102.87 60.96,105.41 R6.1
NetR3_1: R3.1 R4.1 | length 2.5
  Bottom Layer w0.7: R3.1 R4.1
NetR3_2: R3.2 U2.6 U2.7 | length 7.6
  Bottom Layer w0.7: U2.6 U2.7 R3.2
NetR5_1: R5.1 R9.1 | length 11.2
  Bottom Layer w0.7: R9.1 68.58,144.78 R5.1
NetR10_2: R10.2 R11.2 U2.5 | length 44.6
  Bottom Layer w0.7: U2.5 R11.2 53.34,132.08 66.802,132.08 68.58,130.302 68.58,128.27 67.31,127 62.23,127 58.42,123.19 58.42,120.65 59.69,119.38 R10.2
NetR15_1: R15.1 R17.2 U3.6 | length 7.6
  Bottom Layer w0.7: U3.6 R17.2 R15.1
NetR18_1: R18.1 R20.1 | length 10.2
  Bottom Layer w0.7: R20.1 R18.1
NetR19_2: R19.2 R21.1 | length 10.2
  Bottom Layer w0.7: R21.1 R19.2
NetR22_2: R22.2 R23.1 | length 8.7
  Bottom Layer w0.7: R22.2 20.32,127 R23.1
NetR24_2: R24.2 R25.1 | length 7.6
  Bottom Layer w0.7: R24.2 R25.1
NetR28_1: R28.1 R30.2 | length 2.5
  Bottom Layer w0.7: R30.2 R28.1
NetR29_1: R29.1 R32.2 U2.9 | length 16.3
  Bottom Layer w0.7: R29.1 26.67,134.62 29.21,132.08 R32.2 U2.9
NetR30_1: R30.1 R33.2 U3.2 | length 7.6
  Bottom Layer w0.7: R30.1 R33.2 U3.2
NetR31_1: R31.1 R34.2 U1.9 | length 16.3
  Bottom Layer w0.7: R31.1 26.67,110.49 29.21,107.95 R34.2 U1.9
NetR35_1: R35.1 R37.2 R37.3 | length 12.7
  Bottom Layer w0.7: R37.2 R37.3 R35.1
NetR35_2: R35.2 R36.2 U1.12 | length 8.7
  Bottom Layer w0.7: R35.2 R36.2 34.29,97.79 36.83,100.33 U1.12
NetR38_1: R38.1 R39.1 U6.2 | length 75.6
  Bottom Layer w0.7: U6.2 R39.1 53.34,19.05 55.88,16.51 55.88,13.97 58.42,11.43 67.31,11.43 68.58,10.16 76.2,10.16 77.47,11.43 77.47,30.48 72.39,35.56 62.23,35.56 R38.1
NetR39_2: R39.2 R43.1 U6.1 | length 30.8
  Top Layer w0.7: v1(50.8,16.51) v1(60.96,16.51)
  Bottom Layer w0.7: U6.1 v1(50.8,16.51) ; v1(60.96,16.51) R39.2 59.69,19.05 58.42,20.32 58.42,26.67 R43.1
NetR40_1: R40.1 R41.1 | length 2.5
  Bottom Layer w0.7: R40.1 R41.1
NetR40_2: R40.2 U7.6 U7.7 | length 7.6
  Bottom Layer w0.7: U7.6 U7.7 R40.2
NetR42_1: R42.1 R46.1 | length 11.2
  Bottom Layer w0.7: R46.1 68.58,66.04 R42.1
NetR47_2: R47.2 R48.2 U7.5 | length 46.9
  Bottom Layer w0.7: U7.5 R48.2 53.34,53.34 67.818,53.34 69.85,51.308 69.85,49.53 67.31,46.99 60.96,46.99 58.42,44.45 58.42,41.91 59.69,40.64 R47.2
NetR52_1: R52.1 R54.2 U8.6 | length 7.6
  Bottom Layer w0.7: U8.6 R54.2 R52.1
NetR55_1: R55.1 R57.1 | length 10.2
  Bottom Layer w0.7: R57.1 R55.1
NetR56_2: R56.2 R58.1 | length 10.2
  Bottom Layer w0.7: R58.1 R56.2
NetR59_2: R59.2 R60.1 | length 8.7
  Bottom Layer w0.7: R59.2 20.32,48.26 R60.1
NetR61_2: R61.2 R62.1 | length 7.6
  Bottom Layer w0.7: R61.2 R62.1
NetR65_1: R65.1 R67.2 | length 2.5
  Bottom Layer w0.7: R67.2 R65.1
NetR66_1: R66.1 R69.2 U7.9 | length 7.6
  Bottom Layer w0.7: R66.1 R69.2 U7.9
NetR67_1: R67.1 R70.2 U8.2 | length 7.6
  Bottom Layer w0.7: R67.1 R70.2 U8.2
NetR68_1: R68.1 R71.2 U6.9 | length 16.3
  Bottom Layer w0.7: R68.1 26.67,31.75 29.21,29.21 R71.2 U6.9
NetR72_1: R72.1 R74.2 R74.3 | length 12.7
  Bottom Layer w0.7: R74.2 R74.3 R72.1
NetR72_2: R72.2 R73.2 U6.12 | length 8.7
  Bottom Layer w0.7: R72.2 R73.2 34.29,19.05 36.83,21.59 U6.12
NetR76_1: R76.1 R77.2 U9.5 | length 16.3
  Bottom Layer w0.7: R76.1 88.9,120.65 91.44,123.19 R77.2 U9.5
NetR79_2: R79.2 R80.1 | length 22.4
  Bottom Layer w0.7: R79.2 82.55,128.27 82.55,115.57 85.09,113.03 R80.1
NetR82_1: R82.1 U9.9 | length 6.1
  Bottom Layer w0.7: U9.9 109.22,120.65 111.76,118.11 R82.1
NetR83_2: R83.2 R84.1 U9.10 | length 7.6
  Bottom Layer w0.7: U9.10 R84.1 R83.2
NetR86_2: R86.2 U9.7 | length 5.1
  Bottom Layer w0.7: R86.2 U9.7
NetU2_13: U2.13 U2.14 | length 2.5
  Bottom Layer w0.7: U2.14 U2.13
NetU7_13: U7.13 U7.14 | length 2.5
  Bottom Layer w0.7: U7.14 U7.13
VCC: CD1.1 CD3.1 CD5.1 CD7.1 CD9.1 CD11.1 CD13.1 CD15.1 CD17.1 CD19.1 CD20.1 CF1.1 J9.2 R16.3 R53.3 R78.2 R81.2 R83.1 U1.4 U2.4 U3.8 U4.1 U5.14 U6.4 U7.4 U8.8 U9.4 U11.8 U12.8 | length 546.4
  Top Layer w0.7: v1(107.95,100.33) v1(107.95,111.76) ; v1(113.03,111.76) v1(120.65,111.76)
  Bottom Layer w0.7: CD11.1 U6.4 44.45,24.13 43.18,25.4 43.18,46.99 44.45,48.26 ; CD13.1 U7.4 44.45,48.26 ; CD15.1 U8.8 44.45,76.2 ; CD1.1 U1.4 44.45,102.87 ; CD3.1 U2.4 44.45,127 ; CD5.1 U3.8 44.45,154.94 ; R16.3 96.52,74.93 104.14,74.93 105.41,76.2 ; R53.3 93.98,90.17 96.52,87.63 104.14,87.63 105.41,88.9 ; CD17.1 U9.4 101.6,125.73 105.41,121.92 105.41,114.3 v1(107.95,111.76) v1(113.03,111.76) ; U4.1 CD7.1 97.79,59.69 99.06,60.96 101.6,60.96 102.87,59.69 ; CD9.1 U5.14 104.14,27.94 102.87,29.21 102.87,59.69 ; v1(107.95,100.33) U11.8 ; CD20.1 U12.8 106.68,85.09 ; CD19.1 U11.8 ; R81.2 114.3,74.93 106.68,74.93 ; R78.2 123.19,92.71 124.46,93.98 124.46,97.79 120.65,101.6 v1(120.65,111.76) ; R83.1 121.92,120.65 120.65,119.38 v1(120.65,111.76) ; 44.45,48.26 43.18,49.53 43.18,74.93 44.45,76.2 ; 44.45,76.2 43.18,77.47 43.18,101.6 44.45,102.87 ; 44.45,102.87 43.18,104.14 43.18,125.73 44.45,127 ; 44.45,127 43.18,128.27 43.18,153.67 44.45,154.94 ; 44.45,154.94 43.18,156.21 J9.2 43.18,167.64 44.45,168.91 62.19,168.91 CF1.1 68.62,167.6 71.12,165.1 97.79,165.1 128.27,134.62 128.27,114.3 125.73,111.76 v1(120.65,111.76) ; 102.87,59.69 105.41,62.23 105.41,73.66 106.68,74.93 ; 105.41,76.2 105.41,83.82 106.68,85.09 ; 105.41,76.2 106.68,74.93 ; 105.41,88.9 105.41,86.36 106.68,85.09 ; 105.41,88.9 105.41,96.52 106.68,97.79 U11.8
VEE: CD2.1 CD4.1 CD6.1 CD8.1 CD10.1 CD12.1 CD14.1 CD16.1 CD18.1 CF2.2 J9.1 U1.11 U2.11 U3.4 U4.4 U5.7 U6.11 U7.11 U8.4 U9.11 | length 524.9
  Top Layer w0.7: v1(97.79,8.89) v1(119.38,8.89) ; v1(97.79,38.1) v1(119.38,38.1) ; v1(115.57,109.22) v1(123.19,109.22)
  Bottom Layer w0.7: CD12.1 U6.11 39.37,24.13 40.64,25.4 40.64,46.99 39.37,48.26 ; CD14.1 U7.11 39.37,48.26 ; CD16.1 U8.4 39.37,68.58 ; CD2.1 U1.11 39.37,102.87 ; CD4.1 U2.11 39.37,127 ; CD6.1 U3.4 39.37,147.32 ; CD10.1 U5.7 v1(97.79,8.89) ; v1(97.79,38.1) CD8.1 U4.4 ; U9.11 CD18.1 116.84,124.46 115.57,123.19 v1(115.57,109.22) ; v1(119.38,8.89) v1(119.38,38.1) 129.54,48.26 129.54,97.79 128.27,99.06 128.27,106.68 ; v1(123.19,109.22) 125.73,109.22 128.27,106.68 ; 39.37,48.26 40.64,49.53 40.64,67.31 39.37,68.58 ; 39.37,68.58 40.64,69.85 40.64,101.6 39.37,102.87 ; 39.37,102.87 40.64,104.14 40.64,125.73 39.37,127 ; 39.37,127 40.64,128.27 40.64,146.05 39.37,147.32 ; 39.37,147.32 40.64,148.59 J9.1 40.64,168.91 43.18,171.45 71.08,171.45 CF2.2 100.29,167.6 130.81,137.08 130.81,109.22 128.27,106.68
VI: J1.2 J2.3 R7.1 | length 36.2
  Top Layer w0.7: v1(64.77,87.63) v1(64.77,95.25)
  Bottom Layer w0.7: J2.3 57.15,87.63 v1(64.77,87.63) ; R7.1 63.5,100.33 ; v1(64.77,95.25) 64.77,99.06 63.5,100.33 ; J1.2 66.04,102.87 63.5,100.33
VOLTAGE_REF_A: R53.2 U11.2 | length 6.3
  Bottom Layer w0.7: R53.2 U11.2
VOLTAGE_REF_B: R16.2 U12.3 | length 6.3
  Bottom Layer w0.7: R16.2 U12.3
VT_CLAMPED: U9.13 U9.14 U11.3 U12.2 | length 152.8
  Top Layer w0.7: v1(97.79,72.39) v1(97.79,82.55) ; v1(97.79,92.71) v1(97.79,101.6)
  Bottom Layer w0.7: v1(97.79,72.39) 91.44,72.39 90.17,73.66 90.17,95.25 83.82,101.6 ; v1(97.79,82.55) U12.2 ; v1(97.79,92.71) U11.3 ; v1(97.79,101.6) 83.82,101.6 ; U9.13 U9.14 107.95,137.16 101.6,143.51 87.63,143.51 80.01,135.89 80.01,105.41 83.82,101.6
VT_OUT: C23.1 J8.2 R77.1 U9.1 | length 66.4
  Top Layer w0.7: v1(100.33,140.97) v1(113.03,140.97)
  Bottom Layer w0.7: R77.1 85.09,127 87.63,129.54 87.63,131.064 85.09,133.604 85.09,138.43 87.63,140.97 v1(100.33,140.97) 100.33,137.16 99.06,135.89 ; J8.2 99.06,135.89 ; U9.1 100.33,134.62 99.06,135.89 ; C23.1 v1(113.03,140.97)
pads on no net: "SUJECION 1.1" "SUJECION 2.1" "SUJECION 3.1" "SUJECION 4.1" "SUJECION 5.1" J3.2 J3.3 J5.2 J5.3 J7.2 J7.3 J11.2 J11.3 J12.2 J12.3 J13.2 J13.3 J14.2 J14.3 J15.2 J15.3 J16.2 J16.3 J17.2 J17.3 U5.2 U5.9 U5.10 U11.5 U11.6 U12.5 U12.6

## Polygon pours and split planes (outlines as drawn)
GND on Bottom Layer "Top Overlay-No Net" (solid, remove dead copper, pour order 6): 134.62,77.47 93.98,77.47 93.98,133.35 134.62,133.35
GND on Bottom Layer "Top Overlay-No Net" (solid, remove dead copper, pour order 14): 0,165.1 10.16,165.1 10.16,157.48 69.85,157.48 69.85,68.58 81.28,68.58 81.28,57.15 134.62,57.15 134.62,0 0,0

## Keep-outs
Keep-Out Layer:
  the board outline again, w0.254

## Silkscreen, mask and mechanical layers (free items; w line width, h text height)
Top Overlay:
  rectangle: 49.53,87.884 54.61,89.916
  rectangle: 49.53,8.89 54.61,11.176
  rectangle: 89.154,19.05 91.186,24.13
  rectangle: 89.154,44.45 91.186,49.53
  text "VEE" at 41.402,169.672 h1.52 r90
  text "VCC" at 43.942,169.672 h1.52 r90
  text "GND" at 46.482,169.672 h1.52 r90
  text "ASSD - 2019" at 98.552,164.338 h1.52
  text "TP1 - MUESTREO" at 96.52,160.528 h1.52
  text "GRUPO 1" at 101.854,156.718 h1.52
  text "FAA_Q2" at 78.232,145.542 h1.52 r90
  text "FREQ" at 83.058,115.824 h1.52 r270
  text "FAA_GAIN" at 7.874,103.378 h1.52 r270
  text "DUTY_SH" at 88.9,100.33 h1.52 r270
  text "FAA_Q1" at 78.232,91.186 h1.52 r90
  text "FAA_SW" at 55.118,90.678 h1.52
  text "DUTY_LLA" at 88.9,85.598 h1.52 r270
  text "+" at 4.318,83.058 h1.52 r270
  text "-" at 4.318,75.438 h1.52 r270
  text "OUT_FAA" at 6.858,72.898 h1.52 r270
  text "FR_Q2" at 80.772,67.564 h1.52 r90
  text "+" at 117.602,61.722 h1.52 r90
  text "S/H_SW" at 91.948,58.928 h1.52 r270
  text "-" at 117.602,54.102 h1.52 r90
  text "S/H_OSC" at 120.142,53.34 h1.52 r90
  text "-" at 117.602,50.292 h1.52 r90
  text "+" at 117.602,42.672 h1.52 r90
  text "OUT_S/H" at 120.142,41.91 h1.52 r90
  text "OUT_LLA" at 75.438,30.988 h1.52
  text "+" at 87.122,28.448 h1.52
  text "-" at 94.742,28.448 h1.52
  text "FR_GAIN" at 7.62,23.622 h1.52 r270
  text "-" at 117.602,19.812 h1.52 r90
  text "LLA_SW" at 91.948,18.288 h1.52 r270
  text "FR_Q1" at 78.232,13.208 h1.52 r90
  text "+" at 117.602,12.192 h1.52 r90
  text "VO" at 19.558,11.938 h1.52
  text "FR_SW" at 55.372,11.938 h1.52
  text "LLA_OSC" at 120.142,11.43 h1.52 r90
  text "-" at 23.622,9.398 h1.52
  text "+" at 31.242,9.398 h1.52

## Text inside footprints (layer, text, board x,y; h text height)
CF1: Top Overlay "+" at 64.745,168.224 h1.27 r270
CF2: Top Overlay "+" at 73.685,161.976 h1.27 r90